# Altium PCB wled4.PcbDoc
Units mm, origin at the board's own origin, x right, y up, seen from the top; angles counter-clockwise.
Board outline 53.5 x 20 mm, 4 copper layers (Top Layer, Signal 1, Signal2, Bottom Layer), stack 0.778 mm thick; 32 components, 52 nets, 181 pads, 293 vias.
Unrouted connection lines stored in the file: 1.
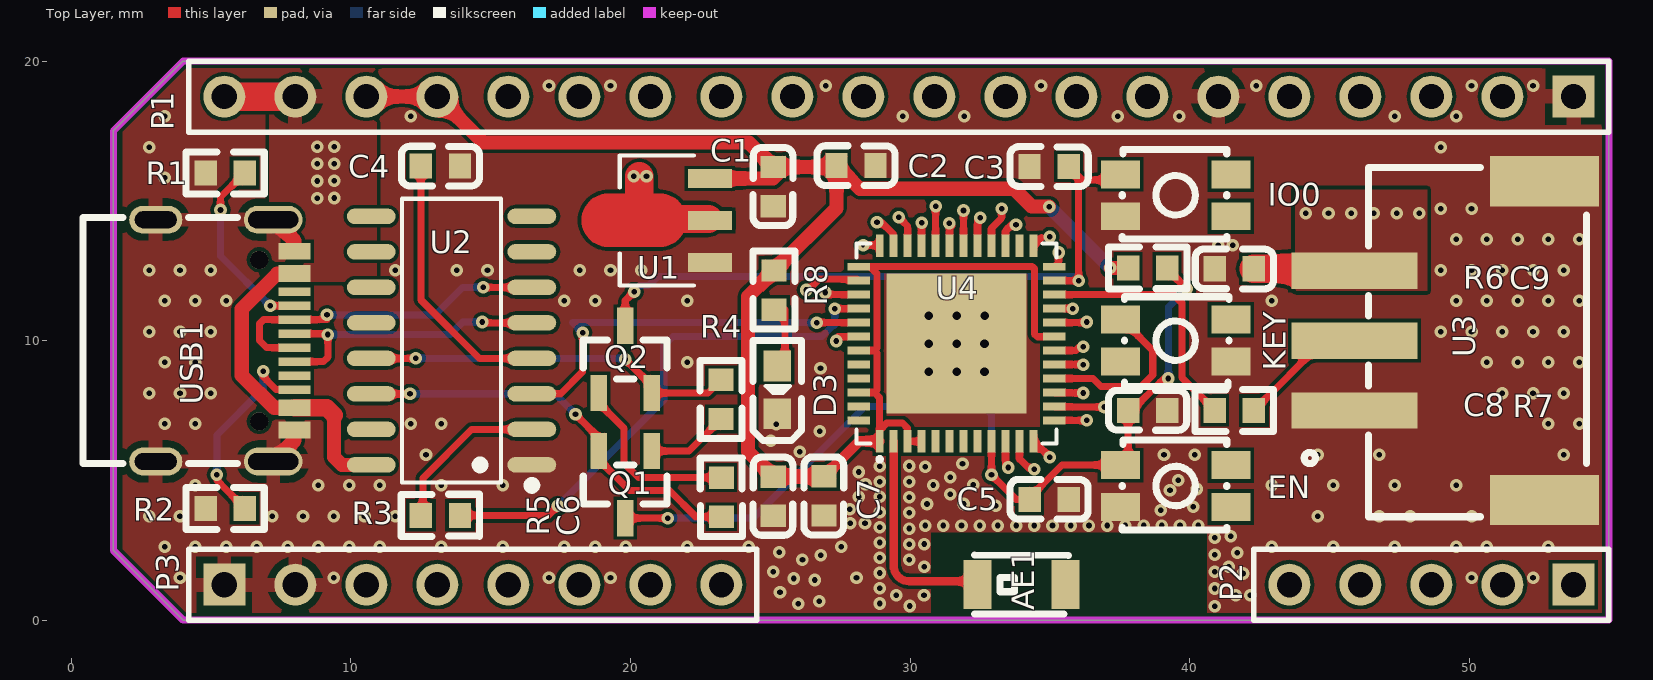
[diagram p0: Top Layer view]
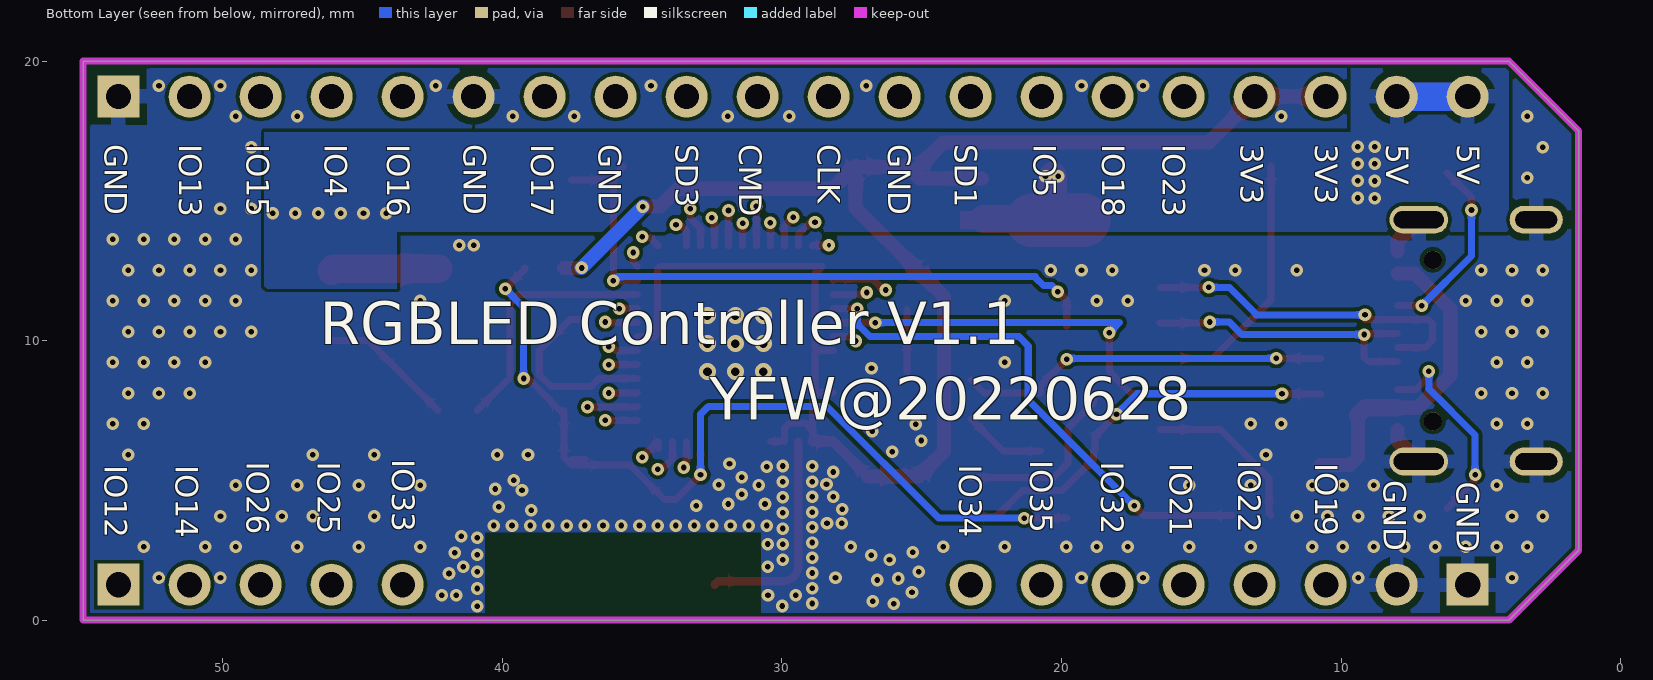
[diagram p1: Bottom Layer view, seen from below]
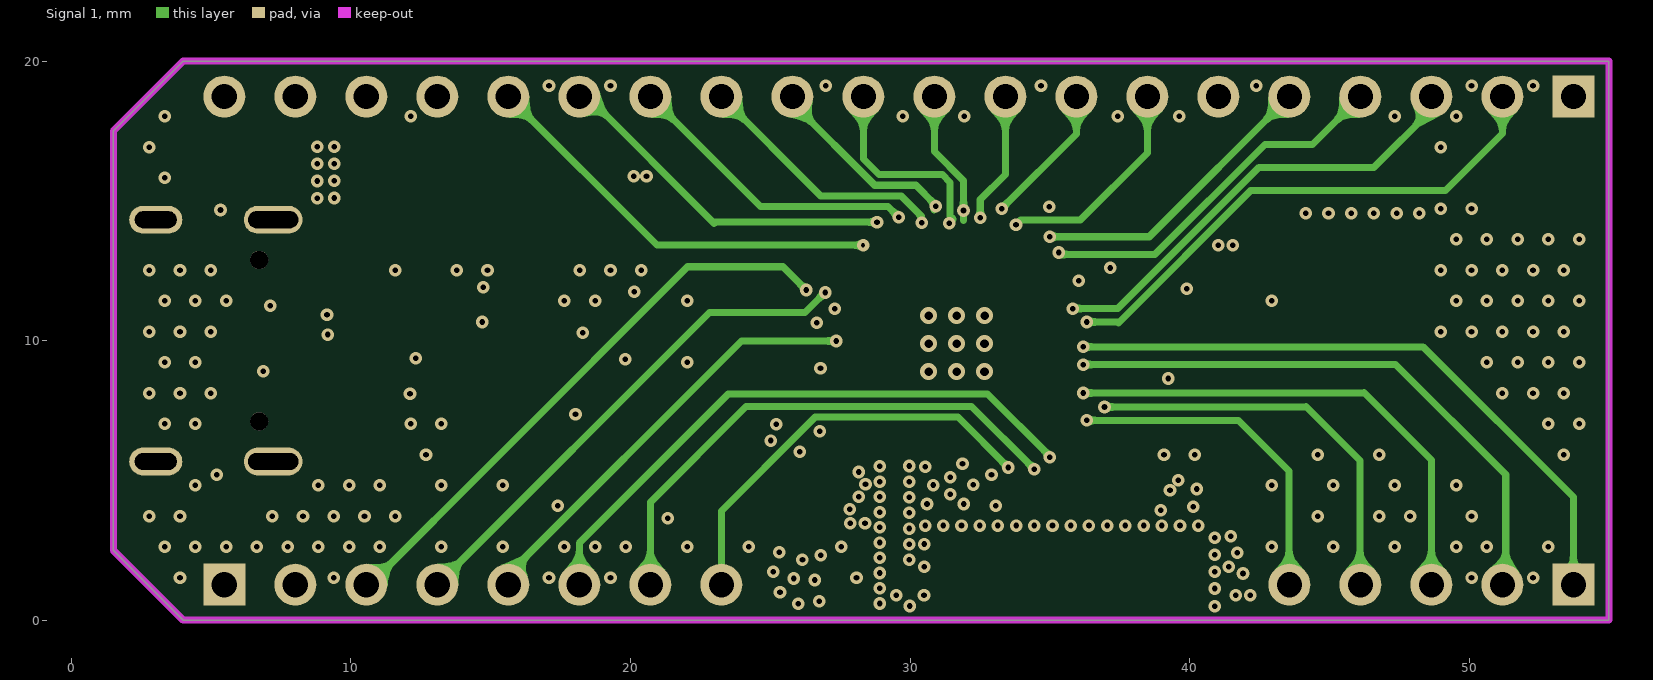
[diagram p2: Signal 1]
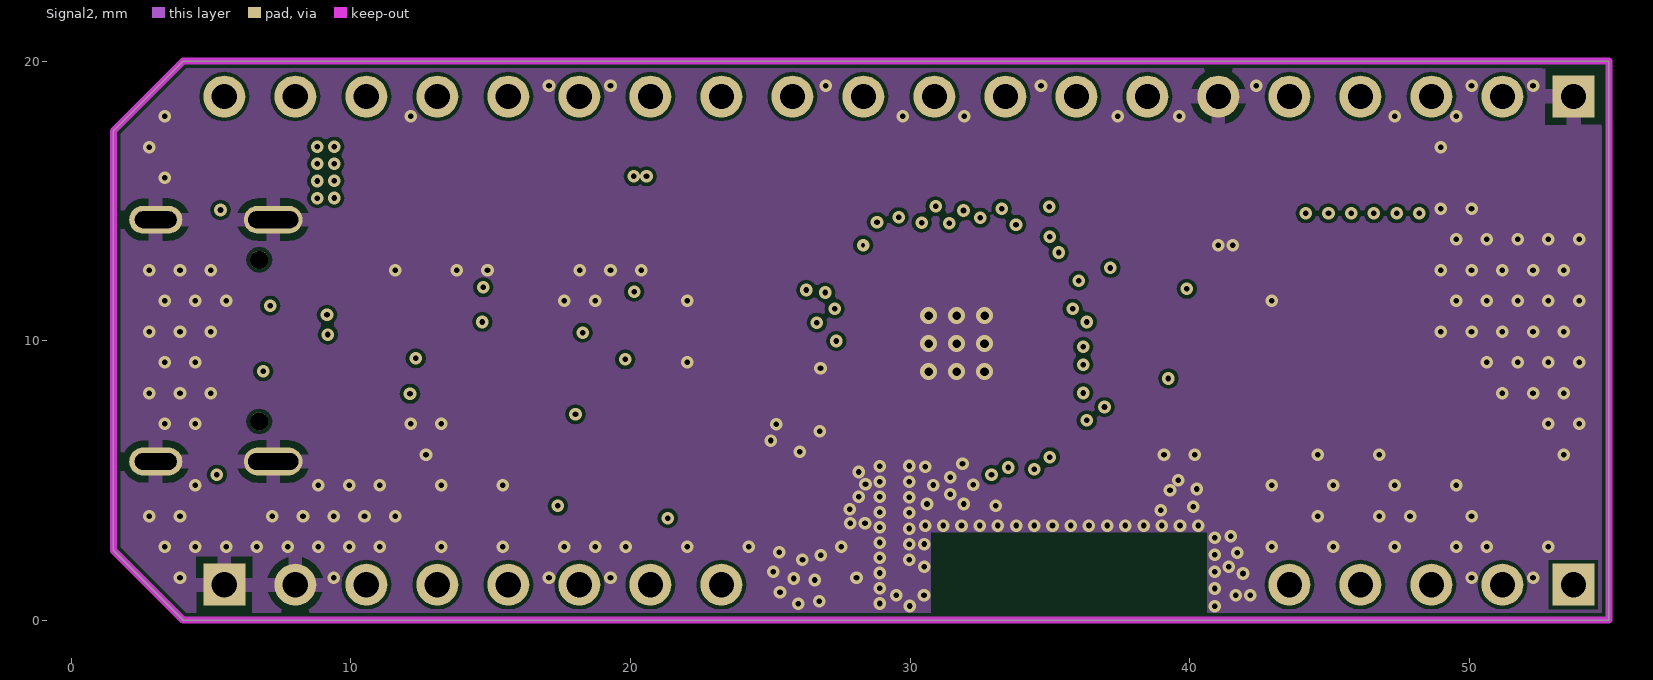
[diagram p3: Signal2]
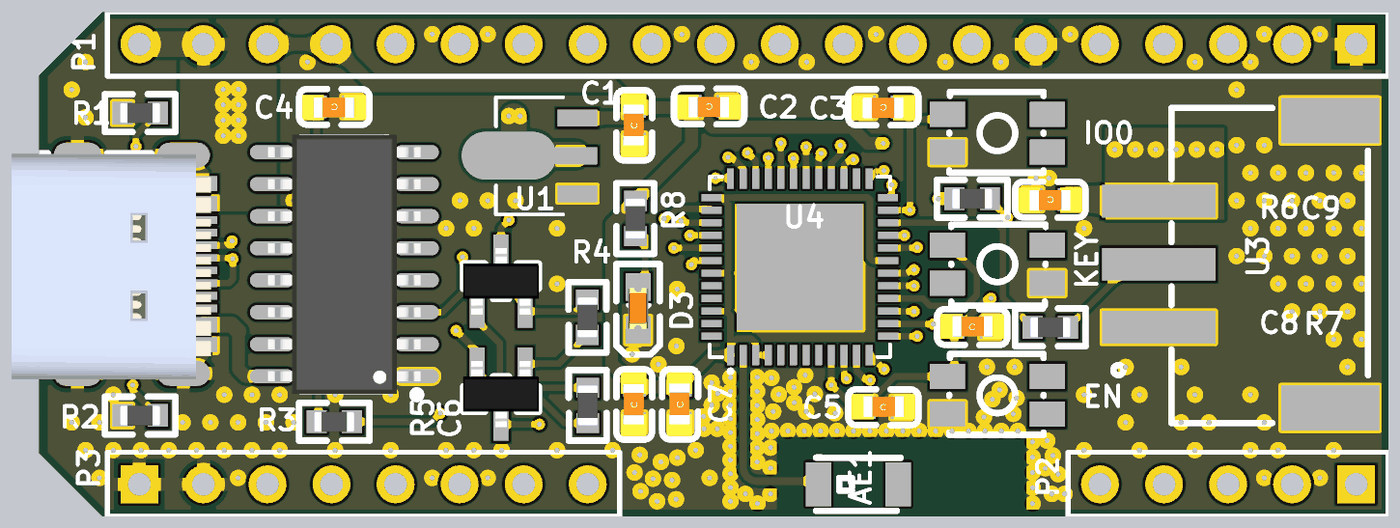
[diagram p4: 3D render of the assembled board from above, using the file's embedded part models]

## Layer stack, top to bottom
Top Solder: solder mask 0.0102, Solder Resist, Dk 3.5
Top Layer: signal copper 0.0356
Dielectric 1: core 0.254, FR-4, Dk 4.2
Signal 1: signal copper 0.036
Dielectric 3: prepreg 0.127, Dk 4.2
Signal2: signal copper 0.036
Dielectric 2: core 0.254, Dk 4.2
Bottom Layer: signal copper 0.0356
Bottom Solder: solder mask 0.0102, Solder Resist, Dk 3.5

## Board outline
1.5,2.5 4,0 55,0 55,20 4,20 1.5,17.5

## Design rules (kind name [scope] priority, off if disabled: settings)
Clearance [All] p1: gap=0.127 ignorepadtopadclearanceinfootprint=FALSE except(0: Arc-Hole Track-Hole SMDPad-Hole THPad-Hole Via-Hole Fill-Hole Poly-Hole Region-Hole Text-Hole)
ComponentClearance [All] p1: gap=0.127 collisioncheckmode=3 verticalgap=0.127 showdistances=FALSE
PolygonConnect [All] p1: thpad.connectstyle=Relief thpad.reliefconductorwidth=0.508 thpad.reliefentries=4 thpad.polygonreliefangle="90 Angle" thpad.airgapwidth=0.254 smdpad.connectstyle=Direct smdpad.reliefconductorwidth=0.254 smdpad.reliefentries=4 smdpad.polygonreliefangle="90 Angle" smdpad.airgapwidth=0.254 via.connectstyle=Direct via.reliefconductorwidth=0.254 via.reliefentries=4 via.polygonreliefangle="90 Angle" via.airgapwidth=0.254
RoutingVias [All] p1: holewidth=0.203 width=0.406 viastyle="Through Hole" minholewidth=0.152 minwidth=0.305 maxholewidth=0.711 maxwidth=1.27
SolderMaskExpansion [All] p1: expansion=0.102
Width [All] p1: maxlimit=1.016 minlimit=0.102 preferedwidth=0.254 toplayer_prefwidth=0.102 midlayer1_minwidth=0.254 midlayer1_maxwidth=0.254 midlayer2_minwidth=0.254 midlayer2_maxwidth=0.254 bottomlayer_prefwidth=0.102 minimp=50.000000 maximp=50.000000 favimp=50.000000
29 further rules are at their usual default settings.

## Components (designator, comment, footprint, x,y, rotation, side; value= is the part's Value field where it differs from the comment)
AE1 "2450AT18A100E" ANT-SMD_L3.2-W1.6 33.984,1.27 r0 top
C1 "10uF" C0603 25.106,15.511 r90 top
C2 "100nF" C0603 28.067,16.268 r180 top
C3 "100nF" C0603 34.976,16.235 r180 top
C4 "100nF" C0603 13.2,16.25 r180 top
C5 "100nF" C0603 34.976,4.318 r0 top
C6 "10uF" C0603 25.106,4.437 r90 top
C7 "100nF" C0603 26.924,4.445 r90 top
C8 "10uF" C0603 38.5,7.5 r0 top
C9 "100nF" C0603 41.6,12.573 r180 top
D3 "LED" LED-0603 25.248,8.242 r90 top
EN "TS-1071SA-A3B3-D4" KEY-SMD_4P-L3.5-W3.0-P1.40-LS4.6 39.5,4.8 r0 top
IO0 "TS-1071SA-A3B3-D4" KEY-SMD_4P-L3.5-W3.0-P1.40-LS4.6 39.5,15.2 r0 top
KEY "TS-1071SA-A3B3-D4" KEY-SMD_4P-L3.5-W3.0-P1.40-LS4.6 39.5,10 r180 top locked
P1 "Header 20" HDR1X20 53.73,18.73 r180 top locked
P2 "Header 5" HDR1X5 53.73,1.27 r180 top locked
P3 "Header 8" HDR1X8 5.47,1.27 r0 top
Q1 "S8050" SOT-23_L2.9-W1.3-P0.95-LS2.4-BR 19.812,4.85 r90 top
Q2 "S8050" SOT-23_L2.9-W1.3-P0.95-LS2.4-BR 19.812,9.328 r270 top
R1 "5.1K" R0603 5.5,16 r180 top locked
R2 "5.1K" R0603 5.5,4 r180 top locked
R3 "1K" R0603 13.2,3.75 r0 top
R4 "12K" R0603 23.241,7.895 r270 top
R5 "12K" R0603 23.25,4.4 r90 top
R6 "10K" R0603 38.5,12.6 r0 top
R7 "100" R0603 41.6,7.5 r180 top
R8 "1K" R0603 25.139,11.811 r90 top
U1 "ME6211A33PG-N" SOT-89_L4.5-W2.5-P1.50-LS4.2-BR 21.485,14.298 r0 top locked
U2 "CH340C" SOP-16_L10.0-W3.9-P1.27-LS6.0-BL 13.6,10 r90 top
U3 "XH2.54-3PSMD" CONN-SMD_XH2.54-3PSMD 49.3,10 r90 top locked
U4 "ESP32-PICO-D4" QFN-48_L7.0-W7.0-P0.50-BL-EP5.4 31.664,9.896 r0 top locked
USB1 "TYPEC-304J-BCP16" USB-C-SMD_TYPEC-304J-BCP16 5.5,10 r270 top

## Footprints (in the part's own frame and the unit in brackets; to place one, negate y for a bottom-side part, rotate by r counter-clockwise, add the part's x,y. Pads: shape width x height; smd on the part's side, far side on the other; paste and mask are expansions set on the pad)
ANT-SMD_L3.2-W1.6 [mm]
  rect 1x1.75 smd: 1(-1.578,0) 2(1.578,0)
  silkscreen extent -1.68,-1.05 1.68,1.06
C0603 [mm]
  rect 0.8x0.9 smd: 1(-0.7,0) 2(0.7,0)
  silkscreen extent -1.4,-0.7 1.4,0.72, body extent -1.29,-0.47 1.31,0.53, height 0.89
CONN-SMD_XH2.54-3PSMD [mm]
  rect 1.3x4.5 smd: 1(-2.5,3.4) 2(0,3.4) 3(2.5,3.4)
  rect 1.8x3.9 smd: 4(-5.7,-3.4) 5(5.7,-3.4)
  silkscreen extent -6.3,-4.9 6.2,5.2
HDR1X5 [mm] "Connector; Header; 5 Position"
  rect 1.5x1.5 hole 0.9: 1(0,0)
  round 1.5 hole 0.9: 2(2.54,0) 3(5.08,0) 4(7.62,0) 5(10.16,0)
  silkscreen extent -1.27,-1.27 11.43,1.27
HDR1X8 [mm] "Connector; Header; 8 Position"
  rect 1.5x1.5 hole 0.9: 1(0,0)
  round 1.5 hole 0.9: 2(2.54,0) 3(5.08,0) 4(7.62,0) 5(10.16,0) 6(12.7,0) 7(15.24,0) 8(17.78,0)
  silkscreen extent -1.27,-1.27 19.05,1.27
HDR1X20 [mm] "Connector; Header; 20 Position"
  rect 1.5x1.5 hole 0.9: 1(0,0)
  round 1.5 hole 0.9: 2(2.54,0) 3(5.08,0) 4(7.62,0) 5(10.16,0) 6(12.7,0) 7(15.24,0) 8(17.78,0) 9(20.32,0) 10(22.86,0) 11(25.4,0) 12(27.94,0) 13(30.48,0) 14(33.02,0) 15(35.56,0) 16(38.1,0) 17(40.64,0) 18(43.18,0) 19(45.72,0) 20(48.26,0)
  silkscreen extent -1.27,-1.27 49.53,1.27
KEY-SMD_4P-L3.5-W3.0-P1.40-LS4.6 [mm]
  rect 1.4x1 smd: 1(-1.975,0.75) 2(1.975,0.75) 3(-1.975,-0.75) 4(1.975,-0.75)
  silkscreen extent -1.91,-1.57 1.83,1.64
LED-0603 [mil]
  rect 43x39 smd: 1(33.5,0) 2(-33.5,0)
  silkscreen extent -72,-34 70,34, body extent -32,-16 32,16, height 24
QFN-48_L7.0-W7.0-P0.50-BL-EP5.4 [mm]
  rect 0.28x0.8 smd: 1(-2.75,-3.5) 2(-2.25,-3.5) 3(-1.75,-3.5) 4(-1.25,-3.5) 5(-0.75,-3.5) 6(-0.25,-3.5) 7(0.25,-3.5) 8(0.75,-3.5) 9(1.25,-3.5) 10(1.75,-3.5) 11(2.25,-3.5) 12(2.75,-3.5) 25(2.75,3.5) 26(2.25,3.5) 27(1.75,3.5) 28(1.25,3.5) 29(0.75,3.5) 30(0.25,3.5) 31(-0.25,3.5) 32(-0.75,3.5) 33(-1.25,3.5) 34(-1.75,3.5) 35(-2.25,3.5) 36(-2.75,3.5)
  rect 0.8x0.28 smd: 13(3.5,-2.75) 14(3.5,-2.25) 15(3.5,-1.75) 16(3.5,-1.25) 17(3.5,-0.75) 18(3.5,-0.25) 19(3.5,0.25) 20(3.5,0.75) 21(3.5,1.25) 22(3.5,1.75) 23(3.5,2.25) 24(3.5,2.75) 37(-3.5,2.75) 38(-3.5,2.25) 39(-3.5,1.75) 40(-3.5,1.25) 41(-3.5,0.75) 42(-3.5,0.25) 43(-3.5,-0.25) 44(-3.5,-0.75) 45(-3.5,-1.25) 46(-3.5,-1.75) 47(-3.5,-2.25) 48(-3.5,-2.75)
  rect 5x5 smd: 49(0,0)
  silkscreen extent -3.58,-4.21 3.58,3.58
R0603 [mm]
  rect 0.8x0.9 smd: 1(-0.7,0) 2(0.7,0)
  silkscreen extent -1.4,-0.75 1.4,0.76, body extent -0.8,-0.4 0.8,0.4, height 0.38
SOP-16_L10.0-W3.9-P1.27-LS6.0-BL [mm]
  oval 0.56x1.745 smd: 1(-4.445,-2.873) 2(-3.175,-2.873) 3(-1.905,-2.873) 4(-0.635,-2.873) 5(0.635,-2.873) 6(1.905,-2.873) 7(3.175,-2.873) 8(4.445,-2.873) 9(4.445,2.873) 10(3.175,2.873) 11(1.905,2.873) 12(0.635,2.873) 13(-0.635,2.873) 14(-1.905,2.873) 15(-3.175,2.873) 16(-4.445,2.873)
  silkscreen extent -5.33,-3.02 5.08,1.77, body extent -5.15,-3.03 5.15,3.03, height 1.95
SOT-23_L2.9-W1.3-P0.95-LS2.4-BR [mm]
  rect 1.3x0.6 smd: 1(1.2,-0.95) 2(1.2,0.95) 3(-1.2,0)
  silkscreen extent -0.7,-1.5 0.7,1.5, body extent -1.32,-1.5 1.32,1.5, height 1.08
SOT-89_L4.5-W2.5-P1.50-LS4.2-BR [mm]
  rect 1.575x0.672 smd: 1(1.356,-1.5) 2(1.356,0) 3(1.356,1.5)
  round 0 smd: 2(-1.356,0.009)
  Top Layer region: -2.283,0.959 -0.429,0.959 -0.385,0.958 -0.34,0.955 -0.296,0.949 -0.252,0.942 -0.208,0.933 -0.165,0.921 -0.123,0.908 -0.081,0.893 -0.04,0.875 0,0.856 0.04,0.835 0.078,0.812 0.115,0.788 0.151,0.761 0.185,0.733 0.219,0.704 0.251,0.673 0.281,0.64 0.31,0.606 0.337,0.571 0.362,0.534 0.386,0.497 0.408,0.458 0.428,0.418 0.447,0.339 2.144,0.339 2.144,-0.321 0.447,-0.321 0.428,-0.401 0.408,-0.44 0.386,-0.479 0.362,-0.517 0.337,-0.553 0.31,-0.588 0.281,-0.622 0.251,-0.655 0.219,-0.686 0.185,-0.716 0.151,-0.744 0.115,-0.77 0.078,-0.795 0.04,-0.818 0,-0.839 -0.04,-0.858 -0.081,-0.875 -0.123,-0.89 -0.165,-0.904 -0.208,-0.915 -0.252,-0.925 -0.296,-0.932 -0.34,-0.937 -0.385,-0.94 -0.429,-0.941 -2.283,-0.941 -2.328,-0.94 -2.372,-0.937 -2.416,-0.932 -2.46,-0.925 -2.504,-0.915 -2.547,-0.904 -2.589,-0.89 -2.631,-0.875 -2.672,-0.858 -2.713,-0.839 -2.752,-0.818 -2.79,-0.795 -2.827,-0.77 -2.863,-0.744 -2.898,-0.716 -2.931,-0.686 -2.963,-0.655 -2.993,-0.622 -3.022,-0.588 -3.049,-0.553 -3.075,-0.517 -3.098,-0.479 -3.12,-0.44 -3.141,-0.401 -3.159,-0.36 -3.175,-0.318 -3.189,-0.276 -3.202,-0.233 -3.212,-0.19 -3.22,-0.146 -3.227,-0.102 -3.231,-0.058 -3.233,-0.013 -3.233,0.031 -3.231,0.076 -3.227,0.12 -3.22,0.164 -3.212,0.208 -3.202,0.251 -3.189,0.294 -3.175,0.336 -3.159,0.377 -3.141,0.418 -3.12,0.458 -3.098,0.497 -3.075,0.534 -3.049,0.571 -3.022,0.606 -2.993,0.64 -2.963,0.673 -2.931,0.704 -2.898,0.733 -2.863,0.761 -2.827,0.788 -2.79,0.812 -2.752,0.835 -2.713,0.856 -2.672,0.875 -2.631,0.893 -2.589,0.908 -2.547,0.921 -2.504,0.933 -2.46,0.942 -2.416,0.949 -2.372,0.955 -2.328,0.958
  silkscreen extent -1.87,-2.33 0.78,2.33
USB-C-SMD_TYPEC-304J-BCP16 [mm]
  oval 1x2.1 hole 0.6 slot 1.8 at 90 deg: 13(-4.325,1.719) 14(4.325,1.719)
  oval 1x1.9 hole 0.6 slot 1.5 at 90 deg: 15(-4.325,-2.481) 16(4.325,-2.481)
  rect 0.6x1.15 smd: A1B12(-3.2,2.481) A4B9(-2.4,2.481) B1A12(3.2,2.481) B4A9(2.4,2.481)
  rect 0.3x1.15 smd: A5(-1.25,2.481) A6(-0.25,2.481) A7(0.25,2.481) A8(1.25,2.481) B5(1.75,2.481) B6(0.75,2.481) B7(-0.75,2.481) B8(-1.75,2.481)
  round 0.65 hole 0.65 unplated: ""(-2.89,1.219) ""(2.89,1.219)
  silkscreen extent -4.4,-5.08 4.4,0.44, body extent -4.37,-5.09 4.57,2.81, height 3.11

## Part data
AE1: BOM_JLCPCB Part Class="Extended Part", BOM_Manufacturer="Johanson Dielectrics", BOM_Manufacturer Part=2450AT18A100E, BOM_Supplier=LCSC, BOM_Supplier Part=C89334, Contributor=LCSC, spicePre=A, spiceSymbolName=2450AT18A100E
C1 C2 C3 C4 C5 C6 C7 C8 C9: library part CAP_0603, BOM_Manufacturer=YAGEO, BOM_Manufacturer Part=CC0603GRNPO9BN200, BOM_Supplier=LCSC, BOM_Supplier Part=C325469, Contributor=LCSC, nameAlias=Capacitance, spicePre=C, spiceSymbolName=CC0603GRNPO9BN200
D3: library part LED-Y, BOM_Manufacturer Part=?, nameAlias=Model, spicePre=D, spiceSymbolName=LED
EN IO0 KEY: BOM_JLCPCB Part Class="Extended Part", BOM_Manufacturer=Yuandi, BOM_Manufacturer Part=TS-1071SA-A3B3-D4, BOM_Supplier=LCSC, BOM_Supplier Part=C498309, Contributor=LCSC, spicePre=S, spiceSymbolName=TS-1071SA-A3B3-D4
P1: "Header, 20-Pin", LatestRevisionDate=17-Jul-2002, LatestRevisionNote="Re-released for DXP Platform.", Publisher="Altium Limited"
P2: "Header, 5-Pin", LatestRevisionDate=17-Jul-2002, LatestRevisionNote="Re-released for DXP Platform.", Publisher="Altium Limited"
P3: "Header, 8-Pin", LatestRevisionDate=17-Jul-2002, LatestRevisionNote="Re-released for DXP Platform.", Publisher="Altium Limited"
Q1 Q2: BOM_Manufacturer=GreenPower, BOM_Manufacturer Part=S8050, BOM_Supplier=LCSC, BOM_Supplier Part=C414195, Contributor=LCSC, spicePre=Q, spiceSymbolName=S8050_C414195
R1 R2 R3 R4 R5 R6 R7 R8: library part RES_0603, BOM_Manufacturer=LIZ, BOM_Manufacturer Part=CR0603JA0301G, BOM_Supplier=LCSC, BOM_Supplier Part=C101323, nameAlias="Resistance (Ohms)", spicePre=R, spiceSymbolName=CR0603JA0301G
U1: BOM_JLCPCB Part Class="Extended Part", BOM_Manufacturer="Nanjing Micro One Elec", BOM_Manufacturer Part=ME6211A33PG-N, BOM_Supplier=LCSC, BOM_Supplier Part=C236673, Contributor=LCSC, spicePre=U, spiceSymbolName=ME6211A33PG-N
U2: BOM_JLCPCB Part Class="Extended Part", BOM_Manufacturer=WCH, BOM_Manufacturer Part=CH340C, BOM_Supplier=LCSC, BOM_Supplier Part=C84681, spicePre=U, spiceSymbolName=CH340C
U3: BOM_JLCPCB Part Class="Extended Part", BOM_Manufacturer=null, BOM_Manufacturer Part=XH2.54-3PSMD, BOM_Supplier=LCSC, BOM_Supplier Part=C9900001013, Contributor=LCSC, link="https://cn.bing.com/search?q=datasheet: XH2.54-3PSMD", spicePre=U, spiceSymbolName=XH2.54-3PSMD
U4: BOM_JLCPCB Part Class="Extended Part", BOM_Manufacturer="Espressif Systems", Frequency=-, BOM_Manufacturer Part=ESP32-PICO-D4, BOM_Supplier=LCSC, BOM_Supplier Part=C193707, Contributor=LCSC, spicePre=U, spiceSymbolName=ESP32-PICO-D4
USB1: BOM_JLCPCB Part Class="Extended Part", BOM_Manufacturer=XUNPU(讯普, BOM_Manufacturer Part=TYPEC-304J-BCP16, BOM_Supplier=LCSC, BOM_Supplier Part=C2835315, Contributor=LCSC, spicePre=U, spiceSymbolName=TYPEC-304J-BCP16

## Via types
v1: diameter 0.45, hole 0.2, Top Layer to Bottom Layer, 283 vias
v2: diameter 0.61, hole 0.305, Top Layer to Bottom Layer, tented both sides, 9 vias
v3: diameter 0.45, hole 0.152, Top Layer to Bottom Layer, 1 vias

## Nets (pads, with @x,y where several pads share a name; then routed paths per layer and width w, separated by ;. In a path a pad name is that pad's centre, name@x,y a point inside that pad or via, vN(x,y) a via of type N, cw(c..) or ccw(c..) an arc to the next point about the centre after c; other vN are vias at no path point)
+3V3: C1.2 C2.2 C6.2 C7.2 P1.17 P1.18 R6.1 R8.2 U1.3 U4.1 U4.3 U4.4 U4.19 U4.37 U4.43 U4.46 | length 68.5
  Top Layer w0.254: C2.2@27.31,16.211 C2.2 ; U4.46 28.724,8.146 ; U4.43 28.721,9.646 ; U4.3 29.914,6.866 29.73,7.05 29.169,7.05 28.914,6.795 U4.1 28.91,6.4 28.91,7.96 28.724,8.146 ; 30.055,6.396 U4.4 ; U4.19 34.539,10.146 34.446,10.238 34.446,12.573 34.369,12.65 29.059,12.65 29.055,12.646 28.564,12.646 28.818,12.392 28.818,9.742 28.721,9.646 ; 28.721,9.646 28.818,9.549 28.818,8.24 28.724,8.146
  Top Layer w0.381: C7.2 28.179,6.4 U4.1@28.893,6.4
  Top Layer w0.508: P1.18 P1.17 14.732,17.088 24.229,17.088 C1.2 ; U1.3 25.099,15.798 25.512,16.211 C2.2@27.31,16.211 ; C7.2 26.916,5.137 C6.2 24.205,6.037 24.205,11.577 R8.2 27.367,14.739 C2.2 28.17,15.465 28.181,15.465 28.209,15.437 33.709,15.437 34.351,14.795 v1(34.974,14.795) ; v1(37.169,12.6) R6.1
  Bottom Layer w0.508: v1(34.974,14.795) v1(37.169,12.6)
CLK: P1.11 U4.31 | length 8.2
  Top Layer w0.254: v1(31.406,14.204) 31.386,14.204 31.491,14.099 31.414,14.021 U4.31
  Signal 1 w0.254: P1.11 28.33,16.501 28.893,15.938 31.156,15.938 31.435,15.659 31.435,14.456 31.533,14.358 31.533,14.331 v1(31.406,14.204) v1@31.337,14.273
CMD: P1.10 U4.30 | length 6.1
  Top Layer w0.254: U4.30 v1(31.914,14.654)
  Signal 1 w0.254: P1.10 30.87,16.763 31.914,15.719 v1(31.914,14.654) 31.914,14.304
DATA_IN: R7.2 U4.22 | length 9
  Top Layer w0.254: U4.22 39.433,11.646 39.722,11.357 39.722,8.678 R7.2
DTR: Q2.2 R4.1 U2.13 | length 13.4
  Top Layer w0.254: U2.13 v1(12.319,9.365) ; v1(19.812,9.328) 20.762,8.378 Q2.2 22.774,8.128 R4.1
  Bottom Layer w0.254: v1(12.319,9.365) 19.775,9.365 v1(19.812,9.328)
ESP_EN: C5.1 C8.1 EN.1 Q1.3 R6.2 U4.9 | length 32.8
  Top Layer w0.254: Q1.3 v1(21.333,3.65) ; U4.9 32.914,5.848 v1(32.914,5.2) 33.796,4.318 34.204,4.318 35.436,5.55 EN.1 37.8,5.825 C8.1@37.8,7.356 ; EN.1@37.033,5.75 EN.1@37.525,5.75 ; C8.1 C8.1@37.8,7.356 ; R6.2 39.2,12.556 v1(39.901,11.855) ; v1(39.243,8.646) 39.09,8.646 C8.1@37.8,7.356
  Bottom Layer w0.254: v1(21.333,3.65) 24.393,3.65 28.389,7.646 32.634,7.646 32.914,7.366 v1(32.914,5.2) ; v1(39.243,8.646) 39.243,11.197 v1(39.901,11.855)
ESP_GPIO0: C3.1 IO0.1 Q2.3 U4.23 | length 24.2
  Top Layer w0.254: Q2.3 19.812,11.433 v1(20.129,11.75) ; U4.23 v1(36.031,12.146) C3.1@36.031,15.878 ; C3.1@35.674,16.235 C3.1@36.031,15.878 ; IO0.1@37.525,15.75 36.159,15.75 C3.1@36.031,15.878
  Bottom Layer w0.254: v1(20.129,11.75) 20.346,11.967 20.645,11.967 20.926,12.248 20.926,12.29 35.887,12.29 v1(36.031,12.146)
ESP_RX: R3.2 U4.40 | length 18.8
  Top Layer w0.254: R3.2 17.061,3.75 v1(17.399,4.088) ; v1(27.305,11.146) U4.40
  Bottom Layer w0.254: v1(17.399,4.088) 21.189,7.878 21.189,9.811 21.523,10.146 26.847,10.146 27.149,10.447 27.253,10.552 27.293,10.552 27.305,10.564 v1(27.305,11.146)
ESP_TX: U2.3 U4.41 | length 14.3
  Top Layer w0.254: U2.3 17.496,8.095 18.288,8.887 v1(18.288,10.287) ; v1(26.67,10.646) U4.41
  Bottom Layer w0.254: v1(18.288,10.287) 18.281,10.287 17.922,10.646 v1(26.67,10.646)
GND: C1.1 C2.1 C3.2 C4.1 C5.2 C6.1 C7.1 C8.2 C9.2 D3.2 EN.3 IO0.3 KEY.1 P1.1 P1.6 P3.1 P3.2 R1.2 R2.2 U1.1 U2.1 U3.1 U3.4 U3.5 U4.49 USB1.13 USB1.14 USB1.15 USB1.16 USB1.A1B12 USB1.B1A12 | length 2.9
  Top Layer w0.508: USB1.14 7.981,6.438 USB1.B1A12 ; USB1.13 7.981,13.562 USB1.A1B12
  other v1: 40.894,0.504 29.985,0.508 26.004,0.594 28.914,0.597 26.757,0.675 29.504,0.889 30.498,0.889 41.656,0.889 42.164,0.889 25.348,0.994 40.894,1.134 28.914,1.142 26.597,1.437 25.839,1.492 3.886,1.524 9.386,1.524 17.086,1.524 19.286,1.524 28.086,1.524 50.086,1.524 52.286,1.524 41.91,1.671 28.914,1.687 25.108,1.737 40.894,1.74 30.506,1.91 41.402,1.905 26.152,2.159 29.972,2.159 28.914,2.232 26.807,2.326 40.894,2.345 41.702,2.413 25.317,2.437 3.336,2.624 4.436,2.624 5.536,2.624 6.636,2.624 7.736,2.624 8.836,2.624 9.936,2.624 11.036,2.624 13.236,2.624 15.436,2.624 17.636,2.624 18.736,2.624 19.836,2.624 22.036,2.624 24.236,2.624 27.536,2.624 42.936,2.624 45.136,2.624 47.336,2.624 49.536,2.624 50.636,2.624 52.836,2.624 29.972,2.719 30.506,2.724 28.914,2.777 40.894,2.951 41.475,2.999 29.972,3.278 28.914,3.323 30.537,3.386 31.189,3.386 31.84,3.386 32.492,3.386 33.143,3.386 33.795,3.386 34.446,3.386 35.097,3.386 35.749,3.386 36.4,3.386 37.052,3.386 37.703,3.386 38.355,3.386 39.006,3.386 39.658,3.386 40.309,3.386 27.863,3.472 28.389,3.472 2.786,3.724 3.886,3.724 7.186,3.724 8.286,3.724 9.386,3.724 10.486,3.724 11.586,3.724 44.586,3.724 46.786,3.724 47.886,3.724 50.086,3.724 29.972,3.838 28.914,3.868 38.97,3.937 27.843,3.964 40.132,4.064 33.06,4.094 30.607,4.156 31.916,4.156 28.169,4.417 28.914,4.413 29.972,4.398 31.445,4.509 39.3,4.642 40.259,4.692 4.436,4.824 8.836,4.824 9.936,4.824 11.036,4.824 13.236,4.824 15.436,4.824 42.936,4.824 45.136,4.824 47.336,4.824 49.536,4.824 30.83,4.834 32.258,4.85 28.408,4.868 28.914,4.958 29.972,4.957 39.587,5.013 31.435,5.12 28.169,5.302 28.914,5.503 30.537,5.492 29.972,5.517 31.877,5.6 12.686,5.924 39.086,5.924 40.186,5.924 44.586,5.924 46.786,5.924 53.386,5.924 26.055,6.03 25.019,6.426 26.769,6.753 25.21,7.004 3.336,7.024 4.436,7.024 12.136,7.024 13.236,7.024 52.836,7.024 53.936,7.024 2.786,8.124 3.886,8.124 4.986,8.124 51.186,8.124 52.286,8.124 53.386,8.124 26.797,9.017 3.336,9.224 4.436,9.224 22.036,9.224 50.636,9.224 51.736,9.224 52.836,9.224 53.936,9.224 2.786,10.324 3.886,10.324 4.986,10.324 48.986,10.324 50.086,10.324 51.186,10.324 52.286,10.324 53.386,10.324 3.336,11.424 4.436,11.424 5.536,11.424 17.636,11.424 18.736,11.424 22.036,11.424 42.936,11.424 49.536,11.424 50.636,11.424 51.736,11.424 52.836,11.424 53.936,11.424 2.786,12.524 3.886,12.524 4.986,12.524 11.586,12.524 13.786,12.524 14.886,12.524 18.186,12.524 19.286,12.524 20.386,12.524 48.986,12.524 50.086,12.524 51.186,12.524 52.286,12.524 53.386,12.524 41.03,13.414 41.545,13.417 49.536,13.624 50.636,13.624 51.736,13.624 52.836,13.624 53.936,13.624 48.986,14.724 50.086,14.724 3.336,15.824 2.786,16.924 48.986,16.924 3.336,18.024 12.136,18.024 29.736,18.024 31.936,18.024 37.436,18.024 39.636,18.024 47.336,18.024 49.536,18.024 17.086,19.124 19.286,19.124 26.986,19.124 34.686,19.124 42.386,19.124 50.086,19.124 52.286,19.124
  other v2: 30.664,8.896 31.664,8.896 32.664,8.896 30.664,9.896 31.664,9.896 32.664,9.896 30.664,10.896 31.664,10.896 32.664,10.896
IO4: P1.4 U4.24 | length 13.7
  Top Layer w0.254: U4.24 35.313,12.795 v1(35.313,13.152)
  Signal 1 w0.254: v1(35.313,13.152) 35.385,13.079 38.754,13.079 42.693,17.018 44.398,17.018 P1.4
IO5: P1.14 U4.34 | length 11.8
  Top Layer w0.254: v1(29.591,14.42) 29.914,14.097 U4.34
  Signal 1 w0.254: P1.14 24.645,14.795 29.216,14.795 v1(29.591,14.42)
IO12: P2.1 U4.18 | length 24
  Top Layer w0.254: U4.18 35.929,9.646 36.062,9.779 v1(36.195,9.779)
  Signal 1 w0.254: v1(36.195,9.779) 48.354,9.779 53.73,4.403 P2.1
IO13: P1.2 U4.20 | length 20.2
  Top Layer w0.254: U4.20 36.3,10.646 v1(36.322,10.668)
  Signal 1 w0.254: v1(36.322,10.668) 37.424,10.668 37.457,10.635 42.189,15.367 49.149,15.367 51.19,17.408 P1.2
IO14: P2.2 U4.17 | length 21.8
  Top Layer w0.254: U4.17 36.193,9.146 v1(36.195,9.144)
  Signal 1 w0.254: v1(36.195,9.144) 47.367,9.144 47.369,9.146 51.308,5.207 51.308,1.388 P2.2
IO15: P1.3 U4.21 | length 16.9
  Top Layer w0.254: U4.21 v1(35.814,11.146)
  Signal 1 w0.254: v1(35.814,11.146) v1(35.814,11.146) 36.52,11.147 36.522,11.146 37.429,11.146 42.483,16.2 46.6,16.2 48.65,18.25 P1.3
IO16: P1.5 U4.25 | length 11.1
  Top Layer w0.254: U4.25 34.7,13.682
  Signal 1 w0.254: v1(35,13.716) 38.556,13.716 P1.5
IO17: P1.7 U4.27 | length 9.2
  Top Layer w0.254: U4.27 33.414,13.928 33.638,14.152 v1(33.791,14.152)
  Signal 1 w0.254: v1(33.791,14.152) 33.955,14.316 36.091,14.316 38.49,16.715 P1.7 P1.7@38.101,18.73
IO18: P1.15 U4.35 | length 13.7
  Top Layer w0.254: v1(28.818,14.24) 28.968,14.24 29.415,13.794 U4.35@29.415,13.396
  Signal 1 w0.254: P1.15 18.46,18.73 22.994,14.196 23.038,14.24 v1(28.818,14.24)
IO19: P3.3 U4.38 | length 22.9
  Top Layer w0.254: v1(26.289,11.811) 26.373,11.811 26.764,12.202 28.108,12.202 U4.38
  Signal 1 w0.254: P3.3 10.671,1.27 15.315,5.914 22.045,12.643 25.457,12.643 v1(26.289,11.811)
IO21: P3.5 U4.42 | length 16.5
  Top Layer w0.254: v1(27.366,9.987) 27.366,10.079 27.432,10.146 U4.42
  Signal 1 w0.254: P3.5 15.63,1.642 23.975,9.987 v1(27.366,9.987)
IO22: P3.4 U4.39 | length 19.4
  Top Layer w0.254: v1(26.962,11.723) 27.039,11.646 U4.39
  Signal 1 w0.254: P3.4 22.825,11.005 26.244,11.005 v1(26.962,11.723)
IO23: P1.16 U4.36 | length 15.5
  Top Layer w0.254: v3(28.321,13.415) 28.894,13.415 U4.36
  Signal 1 w0.254: P1.16 20.945,13.415 v3(28.321,13.415)
IO25: P2.4 U4.14 | length 16.2
  Top Layer w0.254: U4.14 35.185,7.625 v1(36.957,7.625)
  Signal 1 w0.254: v1(36.957,7.625) 44.14,7.625 44.161,7.646 46.092,5.715 46.092,1.288 P2.4
IO26: P2.3 U4.15 | length 19
  Top Layer w0.254: U4.15 35.182,8.128 v1(36.195,8.128)
  Signal 1 w0.254: v1(36.195,8.128) 46.216,8.128 46.234,8.146 48.65,5.73 P2.3
IO32: P3.6 U4.12 | length 22.6
  Top Layer w0.254: U4.12@34.414,6.141 U4.12 34.441,6.396 v1(35.003,5.834)
  Signal 1 w0.254: P3.6 18.17,2.767 23.498,8.095 32.774,8.095 35.003,5.866 v1(35.003,5.834)
IO33: P2.5 U4.13 | length 13.2
  Top Layer w0.254: U4.13 v1(36.322,7.146)
  Signal 1 w0.254: v1(36.322,7.146) 41.749,7.146 43.561,5.334 43.561,1.279 P2.5
IO34: P3.8 U4.10 | length 16
  Top Layer w0.254: U4.10 33.414,5.56 v1(33.513,5.461)
  Signal 1 w0.254: P3.8 23.25,3.904 26.29,6.944 26.29,6.952 26.571,7.232 26.579,7.232 26.611,7.264 31.71,7.264 v1(33.513,5.461)
IO35: P3.7 U4.11 | length 20.4
  Top Layer w0.254: U4.11 33.914,5.759 33.922,5.767 34.285,5.404 v1(34.446,5.404)
  Signal 1 w0.254: P3.7 20.71,4.22 24.136,7.646 32.204,7.646 v1(34.446,5.404) v1@34.446,5.419
KEY: KEY.4 U4.16 | length 6.7
  Top Layer w0.254: U4.16 36.544,8.646 36.83,8.36 38.265,8.36 38.681,8.776 38.681,9.653 37.584,10.75 KEY.4 KEY.4@37.104,10.75
NetAE1_1: AE1.1 U4.2 | length 7.8
  Top Layer w0.293: U4.2 29.414,1.95 ccw(c29.972,1.95) 29.972,1.392 32.284,1.392 AE1.1
NetC4_2: C4.2 U2.4 | length 9.6
  Top Layer w0.254: C4.2 12.5,11.463 14.598,9.365 U2.4
NetD3_1: D3.1 R8.1 | length 2.2
  Top Layer w0.254: D3.1@25.527,8.897 R8.1@25.527,11.111
NetQ1_1: Q1.1 R4.2 | length 3
  Top Layer w0.254: Q1.1 22.096,6.05 R4.2
NetQ2_1: Q2.1 R5.2 | length 6.6
  Top Layer w0.254: Q2.1 18.862,7.771 19.775,6.858 19.775,5.612 20.287,5.1 R5.2
NetR1_1: R1.1 USB1.A5 | length 6.7
  Top Layer w0.254: v1(5.334,14.674) 5.334,15.134 R1.1 ; v1(7.112,11.25) USB1.A5
  Bottom Layer w0.254: v1(5.334,14.674) 5.334,13.028 v1(7.112,11.25)
NetR2_1: R2.1 USB1.B5 | length 7.5
  Top Layer w0.254: v1(5.207,5.207) 5.207,4.993 R2.1 ; v1(6.858,8.9) 6.858,8.714 7.322,8.25 USB1.B5
  Bottom Layer w0.254: v1(5.207,5.207) 5.207,6.629 6.866,8.288 6.858,8.296 v1(6.858,8.9)
NetR3_1: R3.1 U2.2 | length 6
  Top Layer w0.254: R3.1 12.573,3.823 12.573,5.08 14.318,6.825 U2.2
NetR7_1: R7.1 U3.2 | length 4.8
  Top Layer w0.254: R7.1 44.8,10 U3.2@46.1,10
RTS: Q1.2 R5.1 U2.14 | length 14.8
  Top Layer w0.254: U2.14 12.108,8.095 v1(12.113,8.1) ; v1(18.034,7.366) 18.809,6.591 18.809,6.05 Q1.2 18.862,5.752 19.972,4.642 21.393,4.642 22.335,3.7 R5.1
  Bottom Layer w0.254: v1(12.113,8.1) 17.3,8.1 v1(18.034,7.366)
SD0: P1.12 U4.32 | length 8.5
  Top Layer w0.254: U4.32 v1(30.914,14.806)
  Signal 1 w0.254: P1.12 25.79,18.502 28.735,15.557 30.209,15.557 30.858,14.908 v1@30.858,14.856 ; v1@30.858,14.683 v1@30.858,14.856 ; v1(30.914,14.806) 30.907,14.806 v1@30.858,14.856
SD1: P1.13 U4.33 | length 10
  Top Layer w0.254: U4.33 v1(30.414,14.224)
  Signal 1 w0.254: P1.13 26.804,15.176 29.687,15.176 30.414,14.449 v1(30.414,14.224)
SD2: P1.8 U4.28 | length 6.6
  Top Layer w0.254: U4.28 32.914,14.021 33.274,14.381 v1(33.274,14.72)
  Signal 1 w0.254: v1(33.274,14.72) 35.95,17.396 P1.8
SD3: P1.9 U4.29 | length 5.7
  Top Layer w0.254: U4.29 32.414,14.298 v1(32.512,14.396)
  Signal 1 w0.254: v1(32.512,14.396) 32.512,15.049 33.41,15.947 P1.9
SENSOR_CN: U4.7
SENSOR_CP: U4.6
SENSOR_VN: U4.8
SENSOR_VP: U4.5
USB_+5V: C9.1 P1.19 P1.20 U1.2 U2.16 U3.3 USB1.A4B9 USB1.B4A9 | length 25.8
  Top Layer w0.508: USB1.B4A9 7.254,7.6 6.096,8.758 6.096,11.129 7.368,12.4 USB1.A4B9 ; 9.398,7.333 9.398,5.842 9.685,5.555 U2.16 ; 21.606,14.298 U1.2@22.841,14.298
  Top Layer w0.635: USB1.B4A9 9.131,7.6 9.398,7.333
  Top Layer w1.016: P1.20 P1.19 ; v1@20.32,15.875 20.32,14.351 U1.2@22.788,14.351 ; C9.1 46.027,12.573 U3.3@46.1,12.5
  Bottom Layer w1.016: P1.20 P1.19
  other v1: 44.157,14.55 44.969,14.55 45.781,14.55 46.593,14.55 47.405,14.55 48.217,14.55 8.794,15.098 9.4,15.102 8.794,15.712 9.4,15.715 20.119,15.88 20.574,15.878 8.794,16.325 9.4,16.328 8.794,16.938 9.4,16.942
USB_DN: U2.6 USB1.A7 USB1.B7 | length 12.4
  Top Layer w0.254: USB1.A7 6.981,9.75 6.731,10 6.731,10.603 6.878,10.75 USB1.B7 9.144,10.75 v1(9.144,10.922) ; v1(14.732,11.905) U2.6
  Bottom Layer w0.254: v1(9.144,10.922) 13.041,10.922 13.026,10.937 13.994,11.905 v1(14.732,11.905)
USB_DP: U2.5 USB1.A6 USB1.B6 | length 10.8
  Top Layer w0.254: USB1.B6 9.017,9.25 9.176,9.409 v1(9.176,10.218) 9.144,10.25 USB1.A6 ; v1(14.699,10.668) 14.732,10.635 U2.5
  Bottom Layer w0.254: v1(9.176,10.218) 13.55,10.218 14,10.668 v1(14.699,10.668)
VDD_SDIO: U4.26
pads on no net: AE1.2 EN.2 EN.4 IO0.2 IO0.4 KEY.2 KEY.3 U2.7 U2.8 U2.9 U2.10 U2.11 U2.12 U2.15 U4.44 U4.45 U4.47 U4.48 USB1. USB1.A8 USB1.B8

## Polygon pours and split planes (outlines as drawn)
USB_+5V on Top Layer "USB_+5V_L01_P016" (solid, pour order 1): 7.074,20.193 7.074,12.1 10.922,12.1 10.922,20.193
USB_+5V on Top Layer "USB_+5V_L01_P006" (solid, pour order 6): 43.688,11.78 43.773,11.864 43.773,15.4 48.496,15.4 48.496,11.78
GND on Top Layer "GND_L01_P016" (solid, remove dead copper, pour order 16): 4.335,20 1.835,17.5 1.835,2.5 4.272,0.063 30.747,-0.008 30.747,3.15 40.64,3.15 40.64,0 55.335,0 55.335,20
USB_+5V on Bottom Layer "USB_+5V_L04_P000" (solid, remove dead copper, pour order 0): 4,17.46 4,20 9.525,20 9.652,19.873 9.652,13.888 4.079,13.888 4.03,13.839 4,13.87
USB_+5V on Bottom Layer "USB_+5V_L04_P010" (solid, pour order 10): 48.496,11.78 48.411,11.864 43.773,11.864 43.773,13.898 4,13.898 4,17.46 48.514,17.46 48.514,11.798
GND on Bottom Layer "GND_L04_P020" (solid, remove dead copper, pour order 20): 4,20 1.5,17.5 1.5,2.5 4,0 30.747,0 30.747,3.15 40.64,3.15 40.64,0 55,0 55,20
GND on Signal2 "Signal2-GND" (solid, pour order 22): 4,20 1.526,17.526 1.526,2.478 4,0 30.747,0 30.747,3.15 40.64,3.15 40.64,0 54.991,0 55,0.009 55,19.939 4.061,19.939

## Keep-outs
Keep-Out Layer:
  the board outline again, w0.254

## Silkscreen, mask and mechanical layers (free items; w line width, h text height)
Bottom Overlay:
  text "5V" at 5.851,17.018 h0.81 r90
  text "5V" at 8.391,17.018 h0.81 r90
  text "3V3" at 10.931,17.018 h0.81 r90
  text "3V3" at 13.581,17.018 h0.81 r90
  text "IO23" at 16.383,17.018 h0.81 r90
  text "IO18" at 18.551,17.018 h0.81 r90
  text "IO5" at 20.987,17.018 h0.81 r90
  text "SD1" at 23.82,17.018 h0.81 r90
  text "GND" at 26.199,17.018 h0.81 r90
  text "CLK" at 28.711,17.018 h0.81 r90
  text "CMD" at 31.528,17.018 h0.81 r90
  text "SD3" at 33.791,17.018 h0.81 r90
  text "GND" at 36.559,17.018 h0.81 r90
  text "IO17" at 38.972,17.018 h0.81 r90
  text "GND" at 41.383,17.018 h0.81 r90
  text "IO16" at 44.117,17.018 h0.81 r90
  text "IO4" at 46.355,17.018 h0.81 r90
  text "IO15" at 49.149,17.018 h0.81 r90
  text "IO13" at 51.562,17.018 h0.81 r90
  text "GND" at 54.229,17.018 h0.81 r90
  text "RGBLED Controller V1.1" at 46.528,9.871 h1.52
  text "YFW@20220628" at 32.579,7.162 h1.52
  text "IO33" at 43.942,5.75 h0.81 r90
  text "IO22" at 13.686,5.715 h0.81 r90
  text "IO35" at 21.118,5.715 h0.81 r90
  text "IO32" at 18.587,5.675 h0.81 r90
  text "IO25" at 46.609,5.675 h0.81 r90
  text "IO26" at 49.149,5.675 h0.81 r90
  text "IO19" at 10.931,5.612 h0.81 r90
  text "IO21" at 16.129,5.612 h0.81 r90
  text "IO34" at 23.65,5.56 h0.81 r90
  text "IO14" at 51.689,5.539 h0.81 r90
  text "IO12" at 54.229,5.539 h0.81 r90
  text "GND" at 8.477,5.013 h0.81 r90
  text "GND" at 5.866,4.946 h0.81 r90
Mechanical 1:
  the board outline again, w0.254